# Altium PCB Sensor_compartment.PcbDoc
Units mm, origin at the board's own origin, x right, y up, seen from the top; angles counter-clockwise.
Board outline 69.72 x 39.73 mm, 2 copper layers (Top Layer, Bottom Layer); 10 components, 14 nets, 67 pads, 2 vias.
Unrouted connection lines stored in the file: 10.
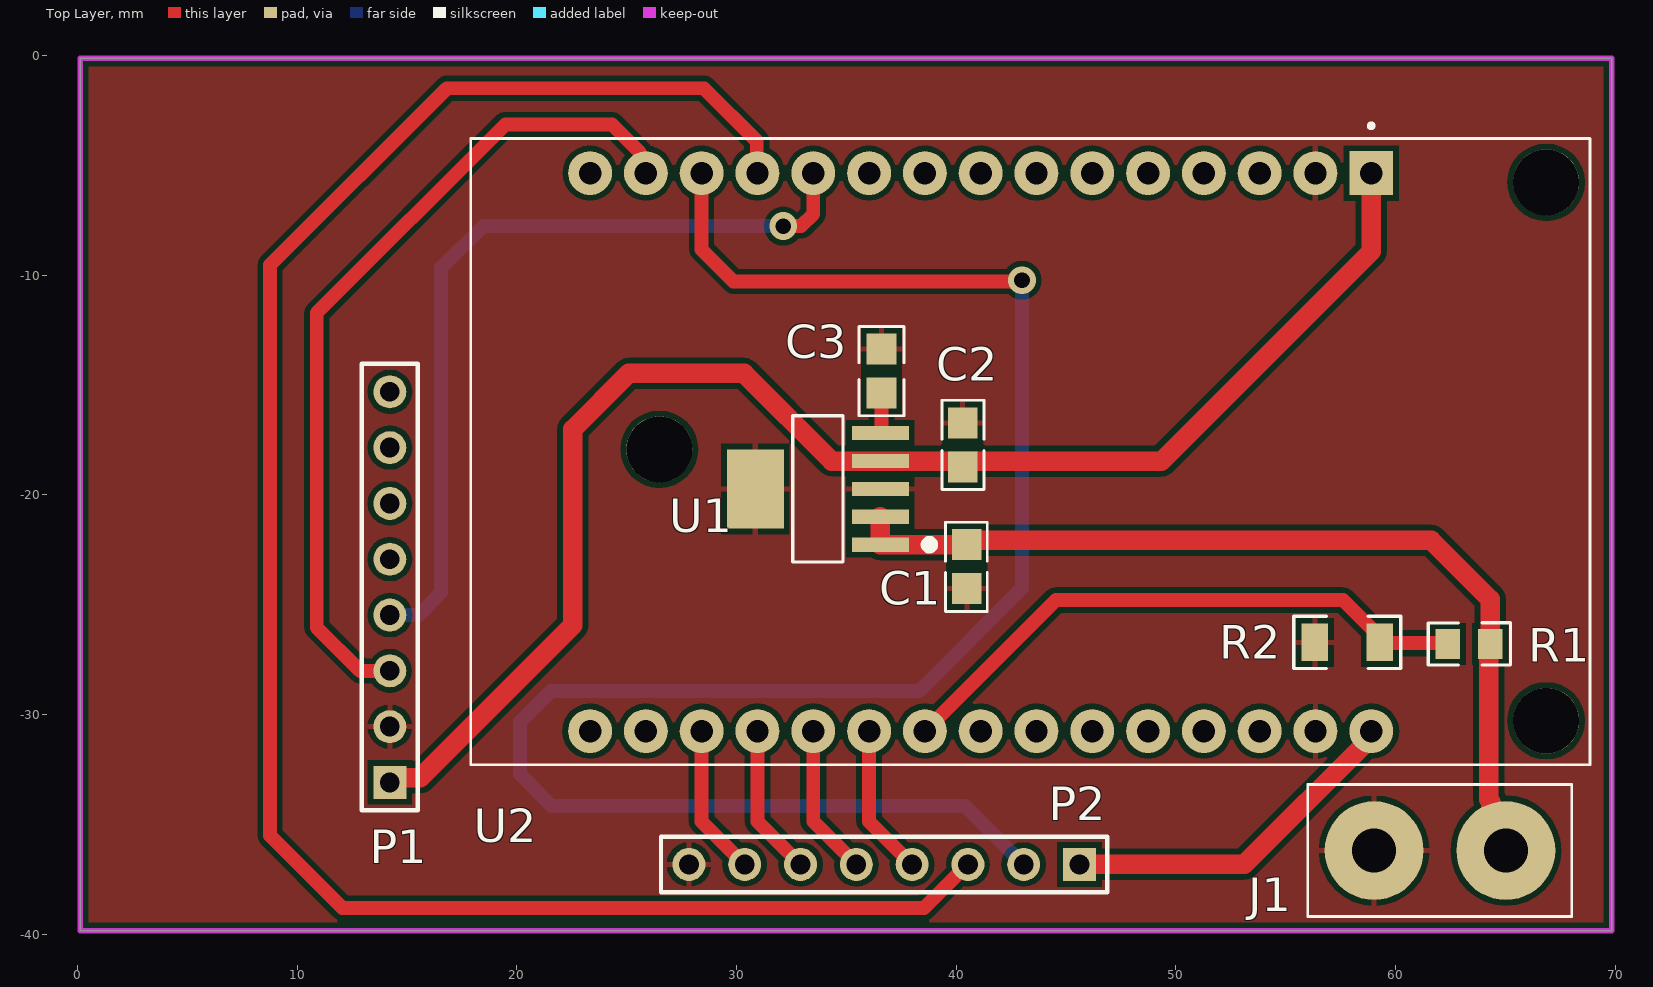
[diagram p0: Top Layer view]
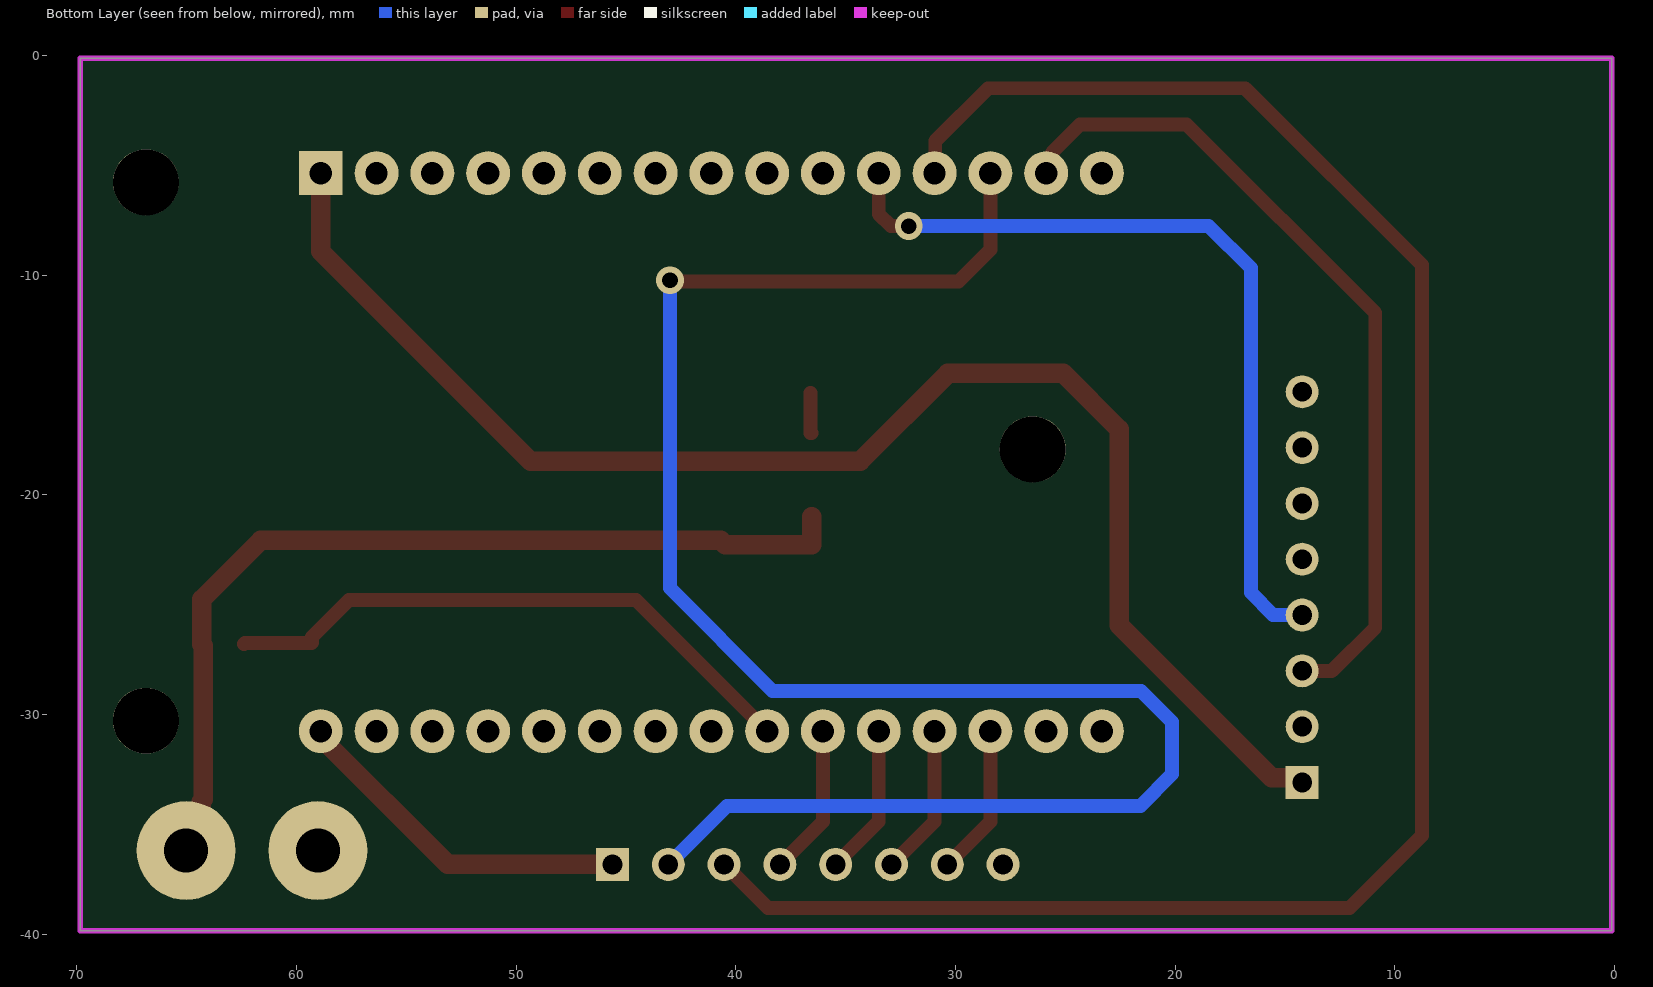
[diagram p1: Bottom Layer view, seen from below]
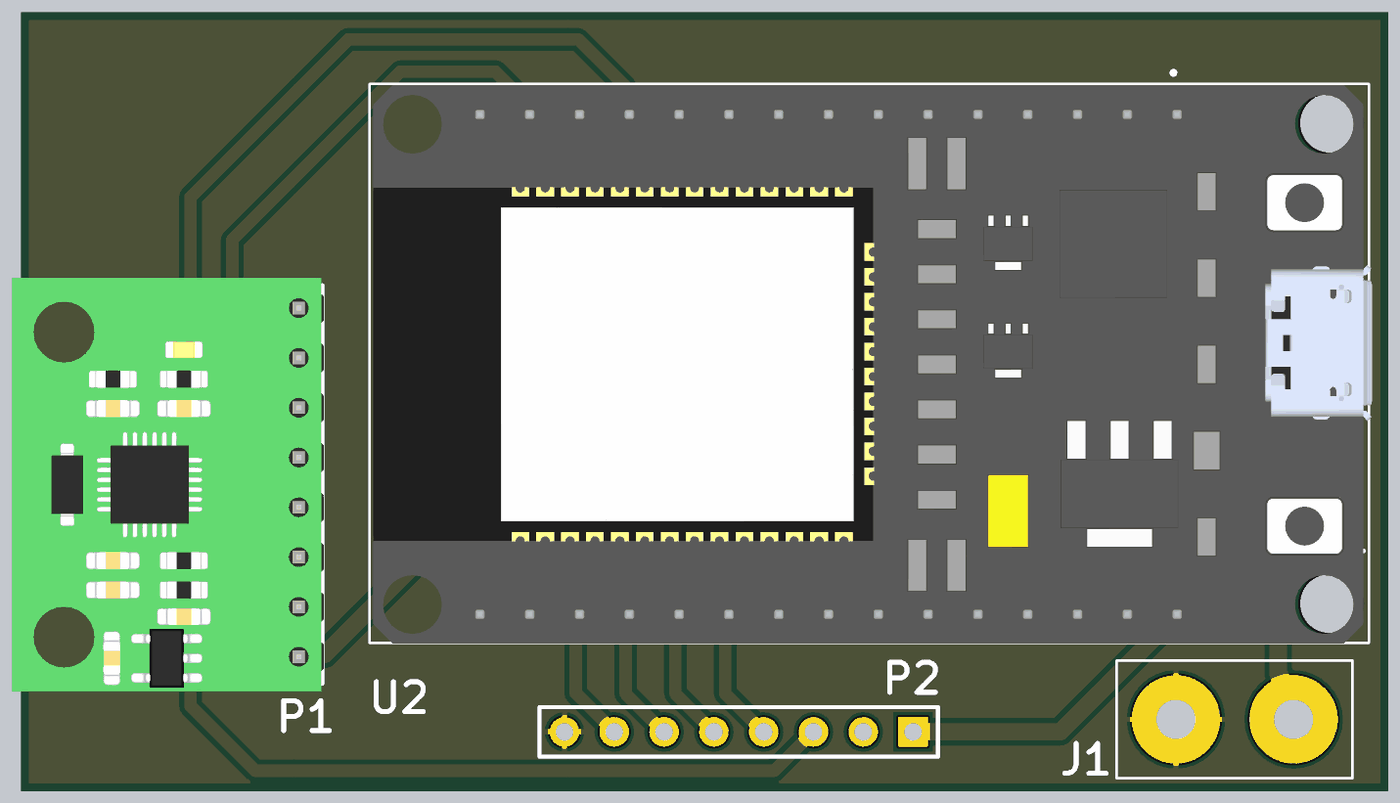
[diagram p2: 3D render of the assembled board from above, using the file's embedded part models]

## Layer stack, top to bottom
Top Solder: solder mask 0.0102, Solder Resist, Dk 3.5
Top Layer: signal copper 0.0356
Dielectric 1: dielectric 0.32, FR-4, Dk 4.8
Bottom Layer: signal copper 0.0356
Bottom Solder: solder mask 0.0102, Solder Resist, Dk 3.5

## Board outline
0.127,-39.853 0.127,-0.127 69.85,-0.127 69.85,-39.853

## Design rules (kind name [scope] priority, off if disabled: settings)
Clearance [All] p1: gap=0.254 ignorepadtopadclearanceinfootprint=FALSE except(0: Arc-Hole Track-Hole SMDPad-Hole THPad-Hole Via-Hole Fill-Hole Poly-Hole Region-Hole Text-Hole)
HoleSize [All] p1: absolutevalues=TRUE maxlimit=5.08 minlimit=0.025 maxpercent=80.000 minpercent=20.000
PolygonConnect [All] p1: connectstyle=Relief reliefconductorwidth=0.254 reliefentries=4 polygonreliefangle="90 Angle" airgapwidth=0.254
RoutingVias [All] p1: holewidth=0.711 width=1.27 viastyle="Through Hole" minholewidth=0.711 minwidth=1.27 maxholewidth=0.711 maxwidth=1.27
SilkToSolderMaskClearance [IsPad] p1: minsilkscreentomaskgap=0.152 clearancetoexposedcopper=TRUE
SolderMaskExpansion [All] p1: expansion=0.102 istentingtop=FALSE
Width [All] p1: maxlimit=1.524 minlimit=0.508 preferedwidth=0.635 minimp=50.000000 maximp=50.000000 favimp=50.000000
28 further rules are at their usual default settings.

## Components (designator, comment, footprint, x,y, rotation, side; value= is the part's Value field where it differs from the comment)
C1 "1uF" "1uF ceramic cap" 40.451,-23.284 r90 top
C2 "1uF" "1uF ceramic cap" 40.335,-17.729 r270 top
C3 "10nF" "1nF cap" 36.601,-14.376 r270 top
J1 "" BATTERY_PAD 62.027,-36.195 r180 top
P1 "Header 8" HDR1X8 14.224,-33.096 r90 top
P2 "Header 8" HDR1X8 45.618,-36.83 r180 top
R1 "100K" R100K 63.348,-26.797 r0 top
R2 "250kΩ" R250K 57.81,-26.721 r0 top
U1 "TPS79533DCQR" TPS79533DCQR 33.706,-19.736 r0 top
U2 "ESP32-DEVKIT-V1" MODULE_ESP32_DEVKIT_V1 43.383,-18.059 r270 top locked

## Footprints (in the part's own frame and the unit in brackets; to place one, negate y for a bottom-side part, rotate by r counter-clockwise, add the part's x,y. Pads: shape width x height; smd on the part's side, far side on the other; paste and mask are expansions set on the pad)
"1nF cap" [mm]
  rect 1.41x1.35 smd: 1(-1,0) 2(1,0)
  silkscreen extent -2.03,-1.02 2.03,1.02, body extent -1,-0.62 1,0.63, height 0.5
"1uF ceramic cap" [mm]
  rect 1.41x1.35 smd: 1(-0.992,-0.036) 2(1.008,-0.036)
  silkscreen extent -2.03,-0.97 2.03,0.93, body extent -1,-0.62 1,0.63, height 0.5
BATTERY_PAD [mm]
  round 4.5 hole 2: 1(-3,0) 2(3,0)
  silkscreen extent -6,-3 6.03,3
HDR1X8 [mm] "Connector; Header; 8 Position"
  rect 1.5x1.5 hole 0.9: 1(0,0)
  round 1.5 hole 0.9: 2(2.54,0) 3(5.08,0) 4(7.62,0) 5(10.16,0) 6(12.7,0) 7(15.24,0) 8(17.78,0)
  silkscreen extent -1.27,-1.27 19.05,1.27, body extent -1.68,-1.33 19.43,14.54, height 6.94
MODULE_ESP32_DEVKIT_V1 [mm]
  rect 2x2 hole 1.02: 1(-12.7,15.515)
  round 2 hole 1.02: 2(-12.7,12.975) 3(-12.7,10.435) 4(-12.7,7.895) 5(-12.7,5.355) 6(-12.7,2.815) 7(-12.7,0.275) 8(-12.7,-2.265) 9(-12.7,-4.805) 10(-12.7,-7.345) 11(-12.7,-9.885) 12(-12.7,-12.425) 13(-12.7,-14.965) 14(-12.7,-17.505) 15(-12.7,-20.045) 16(12.7,-20.045) 17(12.7,-17.505) 18(12.7,-14.965) 19(12.7,-12.425) 20(12.7,-9.885) 21(12.7,-7.345) 22(12.7,-4.805) 23(12.7,-2.265) 24(12.7,0.275) 25(12.7,2.815) 26(12.7,5.355) 27(12.7,7.895) 28(12.7,10.435) 29(12.7,12.975) 30(12.7,15.515)
  round 3 hole 3 unplated: ""(-12.28,23.475) ""(-0.127,-16.891) ""(12.23,23.475)
  silkscreen extent -14.95,-25.48 14.23,25.48, body extent -14.23,-25.3 14.27,25.63, height 9.2
R100K [mm]
  rect 1.133x1.377 smd: 1(-0.966,0) 2(0.966,0)
  silkscreen extent -1.86,-0.95 1.89,0.96, body extent -1,-0.62 1,0.63, height 0.5
R250K [mm]
  rect 1.208x1.701 smd: 1(-1.479,0) 2(1.479,0)
  silkscreen extent -2.43,-1.19 2.43,1.18, body extent -1.6,-0.8 1.6,0.8, height 0.7
TPS79533DCQR [mm]
  rect 2.595x0.644 smd: 1(2.847,-2.54) 2(2.847,-1.27) 3(2.847,0) 4(2.847,1.27) 5(2.847,2.54)
  rect 2.595x3.6 smd: 6(-2.847,0)
  silkscreen extent -1.14,-3.33 5.28,3.33, body extent -3.25,-3.25 3.81,3.25, height 1.8

## Part data
C1 C2: BOM_JLCPCB Part Class="Extended Part", BOM_Manufacturer=Walsin(华新科), BOM_Manufacturer Part=0805F105Z160CT, BOM_Supplier=LCSC, BOM_Supplier Part=C123629, Contributor=LCSC, nameAlias=Capacitance, spicePre=C, spiceSymbolName=0805F105Z160
C3: BOM_JLCPCB Part Class="Extended Part", BOM_Manufacturer="Murata Electronics", BOM_Manufacturer Part=GCM216R71H103KA37D, BOM_Supplier=LCSC, BOM_Supplier Part=C388908, Contributor=LCSC, nameAlias=Capacitance, spicePre=C, spiceSymbolName=GCM216R71H103KA37D
J1: library part BATTERY_PAD, "Battery Connector", Manufacturer=???, ComponentLink1Description=Datasheet, Package=BATTERY_PAD
P1 P2: "Header, 8-Pin", LatestRevisionDate=17-Jul-2002, LatestRevisionNote="Re-released for DXP Platform.", Publisher="Altium Limited"
R1: BOM_JLCPCB Part Class="Extended Part", BOM_Manufacturer=YAGEO(国巨), BOM_Manufacturer Part=RC0805FR-07100KL, Resistance=100kΩ, BOM_Supplier=LCSC, BOM_Supplier Part=C96346, nameAlias="Resistance (Ohms)", spicePre=R, spiceSymbolName=RC0805FR-07100KL
R2: BOM_JLCPCB Part Class="Extended Part", BOM_Manufacturer=Viking(光颉), BOM_Manufacturer Part=AR06BTC2503, Resistance (Ohms)=250K, BOM_Supplier=LCSC, BOM_Supplier Part=C374782, Contributor=LCSC, nameAlias=Resistance, spicePre=R, spiceSymbolName=AR06BTC2503
U1: BOM_JLCPCB Part Class="Extended Part", BOM_Manufacturer=TI, BOM_Manufacturer Part=TPS79533DCQR, BOM_Supplier=LCSC, BOM_Supplier Part=C28669, spicePre=U, spiceSymbolName=TPS79533DCQR
U2: "Dual core, Wi-Fi: 2.4 GHz up to 150 Mbits/s,BLE (Bluetooth Low Energy) and legacy Bluetooth, 32 bits, Up to 240 MHz", Package=None, Availability=Unavailable, MP=ESP32-DEVKIT-V1, Price=None

## Via types
v1: diameter 1.27, hole 0.711, Top Layer to Bottom Layer, 2 vias

## Nets (pads, with @x,y where several pads share a name; then routed paths per layer and width w, separated by ;. In a path a pad name is that pad's centre, name@x,y a point inside that pad or via, vN(x,y) a via of type N, cw(c..) or ccw(c..) an arc to the next point about the centre after c; other vN are vias at no path point)
GND: C1.1 C2.1 C3.1 J1.2 P1.2 P2.8 R2.1 U1.3 U1.6 U2.2 U2.29
GPIO1: P2.2 U2.13 | length 85.1
  Top Layer w0.635: U2.13 28.418,-8.835 29.87,-10.287 42.951,-10.287 v1(43.002,-10.236)
  Bottom Layer w0.635: v1(43.002,-10.236) 43.002,-24.257 38.329,-28.931 21.565,-28.931 20.142,-30.353 20.142,-30.516 20.142,-32.715 21.59,-34.163 40.411,-34.163 P2.2
GPIO3: P2.3 U2.12 | length 87.9
  Top Layer w0.635: U2.12 30.926,-5.327 30.926,-3.9 28.524,-1.499 16.815,-1.499 8.763,-9.55 8.763,-35.509 12.065,-38.811 38.532,-38.811 40.513,-36.83 P2.3
GPIO32: P2.4 U2.21 | length 6.9
  Top Layer w0.635: U2.21 36.038,-34.87 P2.4
GPIO33: R1.1 R2.2 U2.22 | length 27.3
  Top Layer w0.635: U2.22 44.547,-24.79 57.605,-24.79 59.289,-26.474 R2.2 59.327,-26.759 62.343,-26.759 R1.1
GPIO34: P2.6 U2.19 | length 6.9
  Top Layer w0.635: U2.19 30.958,-34.87 P2.6
GPIO35: P2.5 U2.20 | length 6.9
  Top Layer w0.635: U2.20 33.498,-34.87 P2.5
GPIO39: P2.7 U2.18 | length 6.9
  Top Layer w0.635: U2.18 28.418,-34.87 P2.7
NetC1_2: C1.2 J1.1 R1.2 U1.1 U1.2 | length 42
  Top Layer w0.889: U1.2 U1.1 C1.2 40.691,-22.073 61.62,-22.073 64.314,-24.766 R1.2 64.237,-26.874 64.237,-33.869 64.336,-33.968 64.336,-35.504 J1.1
NetC3_2: C3.2 U1.5 | length 1.9
  Top Layer w0.635: U1.5 36.597,-17.196 36.601,-17.191 C3.2
SCLS: P1.3 U2.14 | length 38.3
  Top Layer w0.635: P1.3 12.878,-28.016 10.897,-26.035 10.897,-11.735 19.482,-3.15 24.333,-3.15 25.617,-4.433 25.617,-5.098 U2.14
SDAS: P1.4 U2.11 | length 37.4
  Top Layer w0.635: v1(32.131,-7.772) 32.948,-7.772 33.498,-7.223 U2.11
  Bottom Layer w0.635: P1.4 15.545,-25.476 16.561,-24.46 16.561,-9.689 18.477,-7.772 v1(32.131,-7.772)
VCCS: C2.2 P1.1 U1.4 U2.1 | length 66.8
  Top Layer w0.889: P1.1 14.444,-32.876 15.612,-32.876 22.555,-25.933 22.555,-17.02 25.097,-14.478 30.353,-14.478 34.341,-18.466 U1.4 36.56,-18.473 40.328,-18.473 40.335,-18.479 49.339,-18.479 58.898,-8.92 U2.1
VIN: P2.1 U2.30 | length 16
  Top Layer w0.889: P2.1 53.111,-36.83 58.898,-31.043 U2.30
pads on no net: P1.5 P1.6 P1.7 P1.8 U2. U2.3 U2.4 U2.5 U2.6 U2.7 U2.8 U2.9 U2.10 U2.15 U2.16 U2.17 U2.23 U2.24 U2.25 U2.26 U2.27 U2.28

## Polygon pours and split planes (outlines as drawn)
GND on Top Layer "GND_L01_P000" (solid, pour order 0): 0.127,-39.853 0.127,-0.127 69.85,-0.127 69.85,-39.853

## Keep-outs
Keep-Out Layer:
  the board outline again, w0.254